# Altium PCB urbanturbine_rev2.PcbDoc
Units mm, origin at the board's own origin, x right, y up, seen from the top; angles counter-clockwise.
Board outline 96.52 x 63.5 mm, 2 copper layers (Top Layer, Bottom Layer); 33 components, 40 nets, 148 pads, 15 vias.
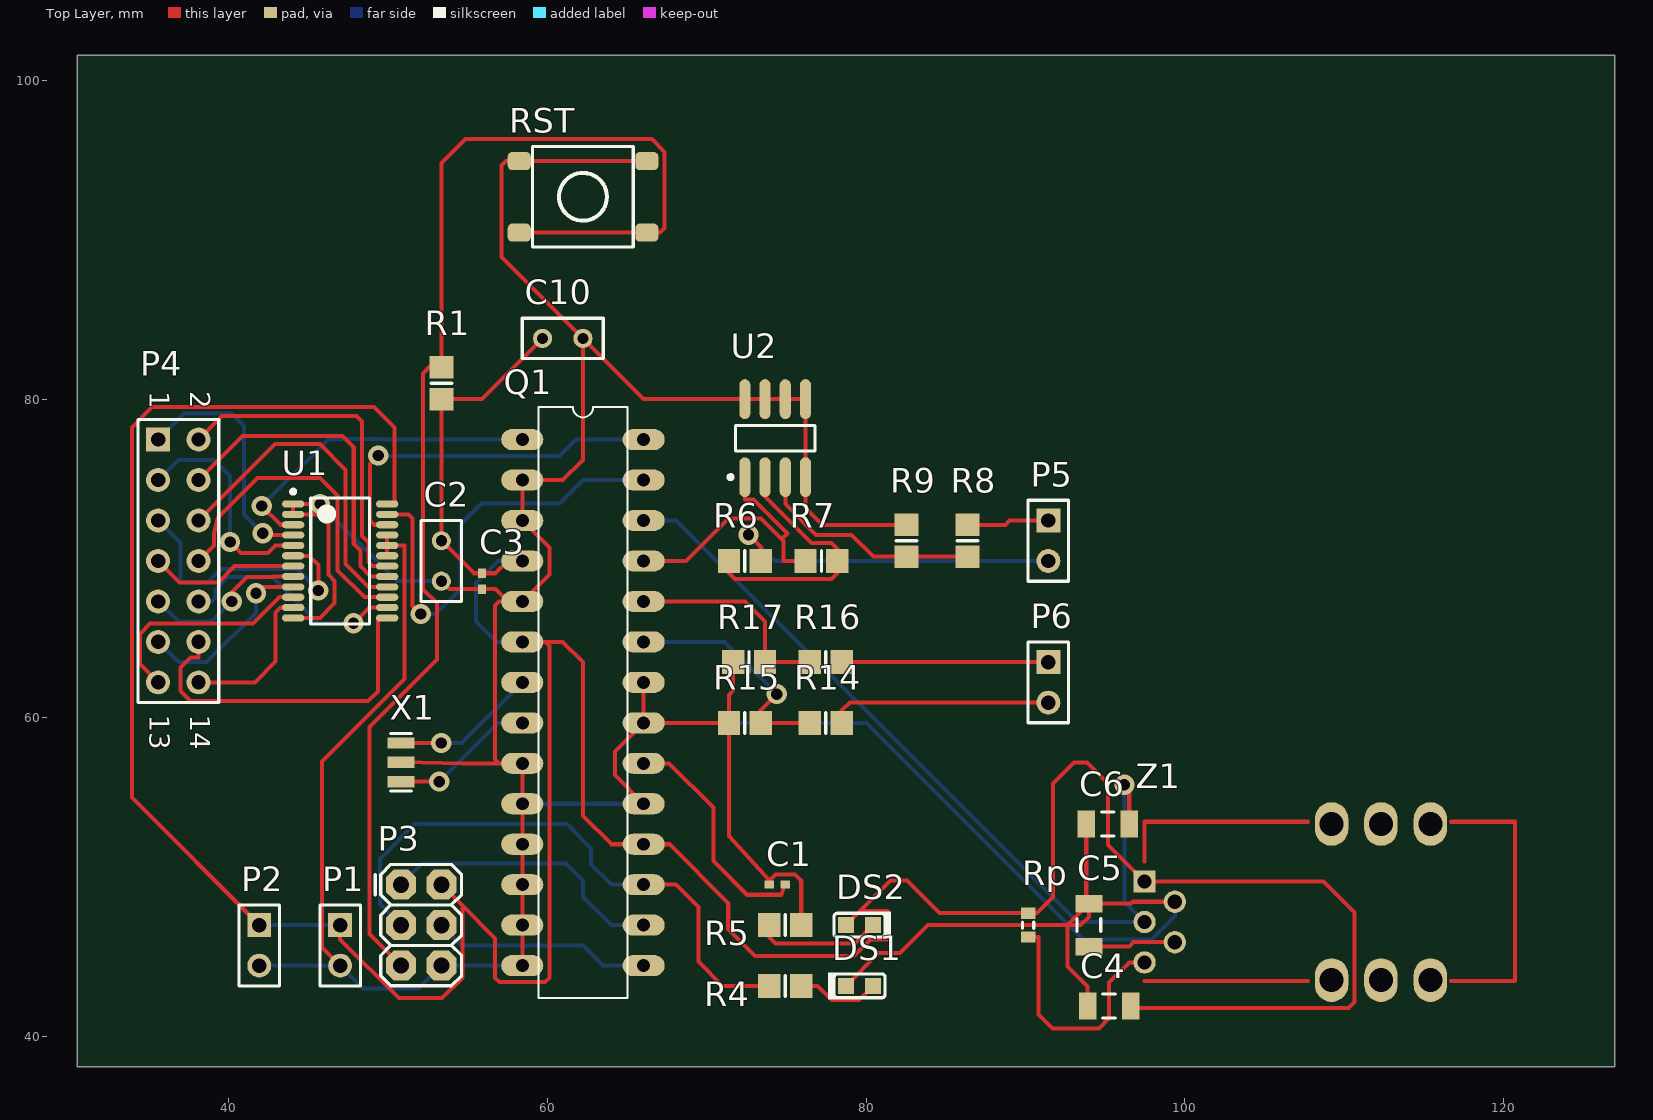
[diagram p0: Top Layer view]
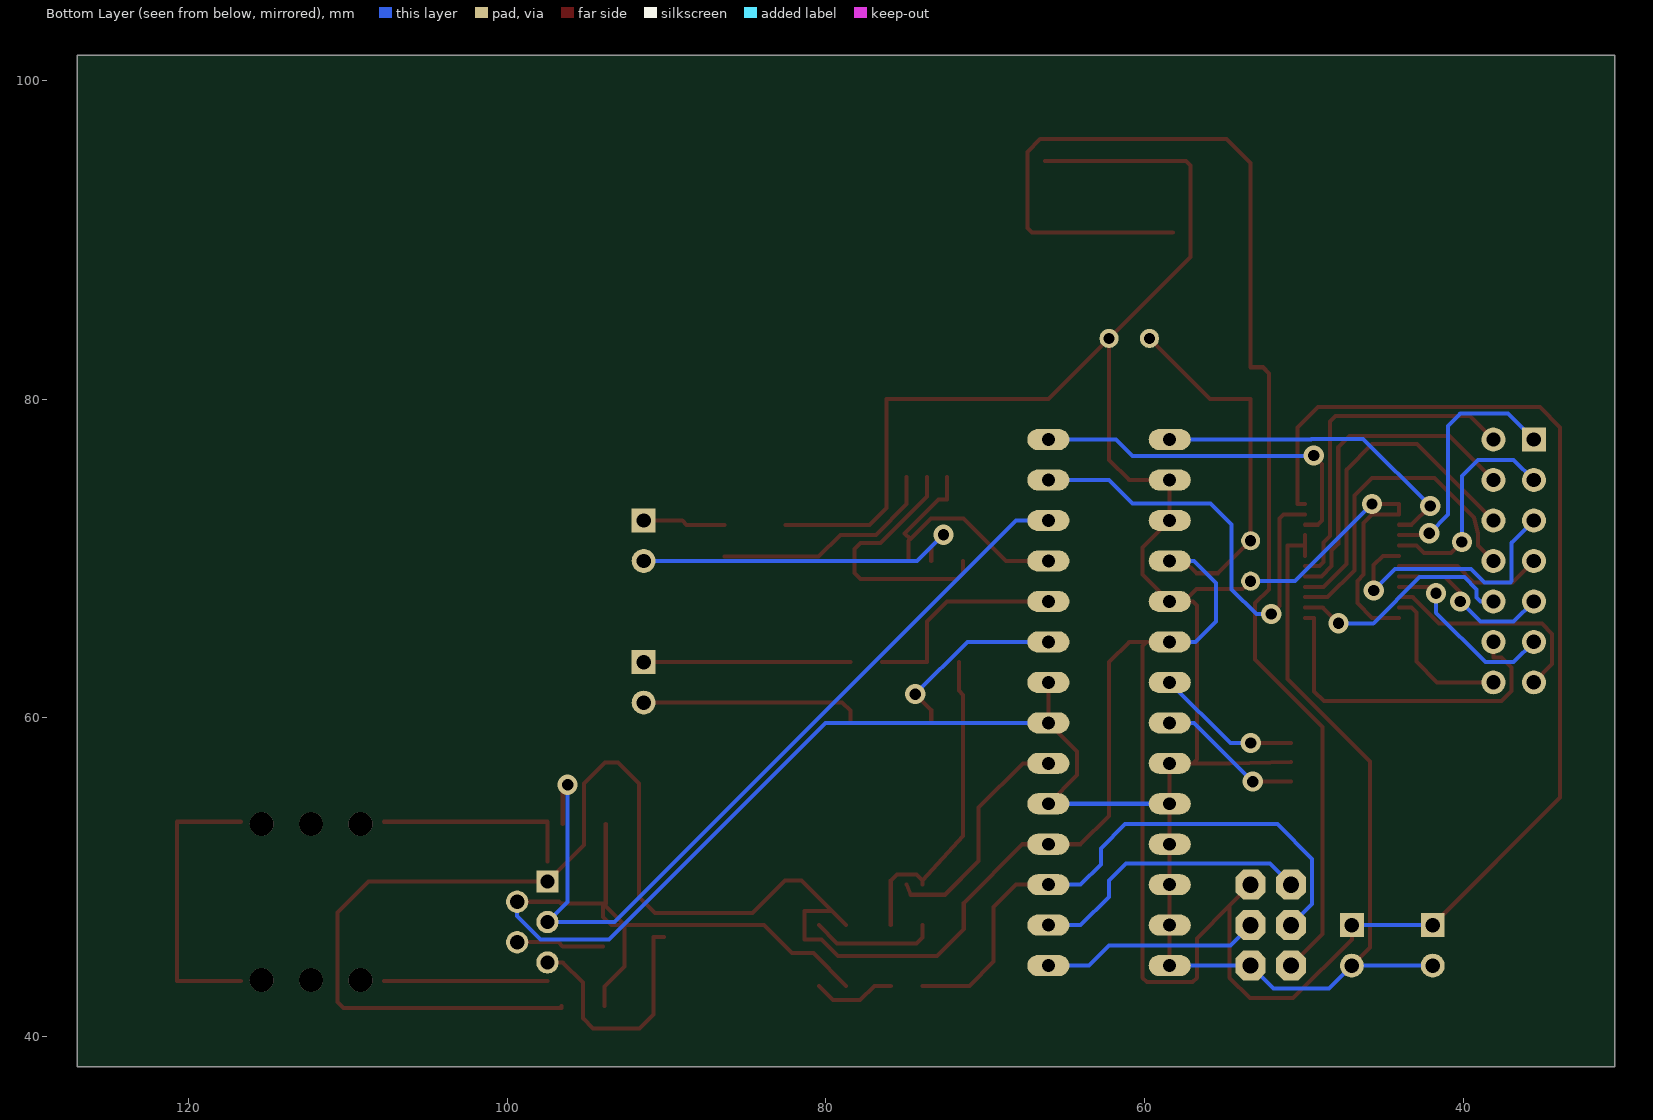
[diagram p1: Bottom Layer view, seen from below]

## Layer stack, top to bottom
Top Solder: solder mask 0.0102, Solder Resist, Dk 3.5
Top Layer: signal copper 0.0356
Dielectric 1: dielectric 0.32, FR-4, Dk 4.8
Bottom Layer: signal copper 0.0356
Bottom Solder: solder mask 0.0102, Solder Resist, Dk 3.5

## Board outline
30.48,38.1 30.48,101.6 127,101.6 127,38.1

## Design rules (kind name [scope] priority, off if disabled: settings)
Clearance [All] p1: gap=0.254 ignorepadtopadclearanceinfootprint=FALSE except(0: Arc-Hole Track-Hole SMDPad-Hole THPad-Hole Via-Hole Fill-Hole Poly-Hole Region-Hole Text-Hole)
PolygonConnect [All] p1: connectstyle=Relief reliefconductorwidth=0.254 reliefentries=4 polygonreliefangle="90 Angle" airgapwidth=0.254
RoutingVias [All] p1: holewidth=0.711 width=1.27 viastyle="Through Hole" minholewidth=0.711 minwidth=1.27 maxholewidth=0.711 maxwidth=1.27
SolderMaskExpansion [All] p1: expansion=0.102
Width [All] p1: maxlimit=0.254 minlimit=0.254 preferedwidth=0.254
30 further rules are at their usual default settings.

## Classes and differential pairs
component class urbanturbine: C1 C2 C3 C10 DS1 DS2 P1 P2 P3 P4 Q1 R1 R4 R5 RST U1 X1
component class sensors: C4 C5 C6 P5 P6 R6 R7 R8 R9 R14 R15 R16 R17 Rp U2 Z1

## Components (designator, comment, footprint, x,y, rotation, side; value= is the part's Value field where it differs from the comment)
C1 "C1005X7R1H104K050BB" 0402 74.43,49.53 r0 top value=0.1uF
C2 "Cap Pol1" RAD-0.1 53.34,69.85 r270 top value=100pF
C3 "C1005X7R1H104K050BB" 0402 55.88,68.58 r90 top value=0.1uF
C4 "Cap Semi" C1206 95.25,41.91 r180 top value=47uF
C5 "Cap Semi" C1206 93.98,46.99 r270 top value=47uF
C6 "Cap Semi" C1206 95.17,53.34 r0 top value=4.7uF
C10 "Cap Pol1" RAD-0.1 60.96,83.82 r0 top value=100pF
DS1 "LTST-C191KRKT" KING-LED0603-25-RED_V 79.59,43.18 r0 top
DS2 "LTST-C191KGKT" KING-LED0603-25-GREEN_V 79.59,46.99 r180 top
P1 "" HDR1X2 46.99,46.99 r270 top
P2 "" HDR1X2 41.91,46.99 r270 top
P3 "M20-9980346" 2X3 50.8,49.53 r270 top
P4 "Header 7X2" HDR2X7 35.56,77.47 r270 top
P5 "" HDR1X2 91.44,72.39 r270 top
P6 "" HDR1X2 91.44,63.5 r270 top
Q1 "ATMEGA328P-MU" *DIL28 62.23,60.96 r0 top
R1 "Res1" 6-0805_M 53.34,81.01 r90 top value=1K
R4 "Res1" 6-0805_M 74.93,43.18 r0 top value=1K
R5 "RC0603JR-071KL" 6-0805_M 74.93,46.99 r0 top value=1k
R6 "10k" 6-0805_M 72.39,69.85 r0 top value="100k Ohm"
R7 "100k" 6-0805_M 77.2,69.85 r0 top value="100k Ohm"
R8 "10k" 6-0805_M 86.36,71.12 r90 top value="100k Ohm"
R9 "100k" 6-0805_M 82.55,71.12 r90 top value="100k Ohm"
R14 "90k" 6-0805_M 77.47,59.69 r0 top value="10k Ohm"
R15 "10k" 6-0805_M 72.39,59.69 r0 top value="22k Ohm"
R16 "90k" 6-0805_M 77.47,63.5 r0 top value="10k Ohm"
R17 "10k" 6-0805_M 72.66,63.5 r0 top value="22k Ohm"
Rp "Res3" J1-0603 90.17,46.99 r270 top value=10K (schematic designator R?)
RST "PTS645SH50SMTR92 LFS" "TACTILE SWITCH SMD" 62.23,92.71 r0 top
U1 "TCA9548A" TCA9548A 46.99,69.85 r0 top
U2 "NCS2333" SO8_M 74.295,77.56 r90 top
X1 "16MHz" RESONATOR-SMD 50.8,57.21 r270 top
Z1 "LEM HO-25P" HO-25 97.48,50.98 r0 top (schematic designator Z*)

## Footprints (in the part's own frame and the unit in brackets; to place one, negate y for a bottom-side part, rotate by r counter-clockwise, add the part's x,y. Pads: shape width x height; smd on the part's side, far side on the other; paste and mask are expansions set on the pad)
2X3 [mil] "2X3"
  oct 74x74 hole 40: 1(0,0) 2(0,100) 3(100,0) 4(100,100) 5(200,0) 6(200,100)
  silkscreen extent -50,-63 250,150, body extent -50,-49 250,149, height 335
6-0805_M [mm] "Chip Resistor, Body 2.0x1.2mm, IPC Low Density"
  rect 1.4x1.5 smd: 1(-1,0) 2(1,0)
  silkscreen extent 0,-0.65 0,0.65, body extent -1.07,-0.7 1.07,0.7, height 0.7
0402 [mm] "Chip Capacitor, Body 1.0x0.5mm, IPC High Density"
  rect 0.6x0.5 smd: 1(-0.5,0) 2(0.5,0)
  body extent -0.55,-0.3 0.55,0.3, height 1.3
*DIL28 [mil]
  oval 104x52 hole 32: 1(-150,650) 2(-150,550) 3(-150,450) 4(-150,350) 5(-150,250) 6(-150,150) 7(-150,50) 8(-150,-50) 9(-150,-150) 10(-150,-250) 11(-150,-350) 12(-150,-450) 13(-150,-550) 14(-150,-650) 15(150,-650) 16(150,-550) 17(150,-450) 18(150,-350) 19(150,-250) 20(150,-150) 21(150,-50) 22(150,50) 23(150,150) 24(150,250) 25(150,350) 26(150,450) 27(150,550) 28(150,650)
  silkscreen extent -110,-730 110,730
C1206 [mm] "Chip Capacitor, Body 3.2x1.6mm, IPC High Density"
  rect 1.1x1.7 smd: 1(-1.35,0) 2(1.35,0)
  silkscreen extent -0.4,-0.75 0.4,0.75, body extent -1.7,-0.9 1.7,0.9, height 1.3
HDR1X2 [mm] "Connector; Header; 2 Position"
  rect 1.5x1.5 hole 0.9: 1(0,0)
  round 1.5 hole 0.9: 2(2.54,0)
  silkscreen extent -1.27,-1.27 3.81,1.27
HDR2X7 [mm] "Connector; Header; 7x2 Position"
  rect 1.5x1.5 hole 0.9: 1(0,0)
  round 1.5 hole 0.9: 2(0,2.54) 3(2.54,0) 4(2.54,2.54) 5(5.08,0) 6(5.08,2.54) 7(7.62,0) 8(7.62,2.54) 9(10.16,0) 10(10.16,2.54) 11(12.7,0) 12(12.7,2.54) 13(15.24,0) 14(15.24,2.54)
  silkscreen extent -1.27,-1.27 16.51,3.81
HO-25 [mm]
  rect 1.4x1.4 / inner rect 2.5x1.4 / far side rect 1.4x1.4 hole 0.9: 1(0,-1.25)
  round 1.4 / inner oval 2.5x1.4 / far side round 1.4 hole 0.9: 2(1.905,-2.52) 3(0,-3.79) 4(1.905,-5.06) 5(0,-6.33)
  oval 2.1x2.74 / inner round 1.5 / far side round 1.5 hole 1.5: ""(11.74,-7.44) ""(11.74,2.36) ""(14.84,-7.44) ""(14.84,2.36) ""(17.94,-7.44) ""(17.94,2.36)
  Top Layer lines w0.254: 0,-7.5 10.25,-7.5 ; 0,0 0,2.5 10.25,2.5 ; 19.25,-7.5 23.25,-7.5 23.25,2.5 19.25,2.5
  body extent -0.22,-8.5 23.72,3.5, height 20.8
J1-0603 [mm] "Chip Resistor, Body 1.6x0.8mm, IPC High Density"
  rect 0.7x0.9 smd: 1(-0.75,0) 2(0.75,0)
  silkscreen extent -0.2,-0.35 0.2,0.35, body extent -0.85,-0.48 0.85,0.48, height 0.9
KING-LED0603-25-GREEN_V [mm] "LED, SMT, Body 1.6 x 0.8 mm, 0.25mm Thickness"
  rect 1x1 smd paste+0 mask+0: 1(0.85,0) 2(-0.85,0)
  silkscreen extent -1.97,-0.85 1.6,0.85, body extent -0.8,-0.4 0.8,0.4, height 0.25
KING-LED0603-25-RED_V [mm] "LED, SMT, Body 1.6 x 0.8 mm, 0.25mm Thickness"
  rect 1x1 smd paste+0 mask+0: 1(0.85,0) 2(-0.85,0)
  silkscreen extent -1.97,-0.85 1.6,0.85, body extent -0.8,-0.4 0.8,0.4, height 0.25
RAD-0.1 [mm] "Radial Cap, Thru-Hole; 2 Leads; 0.1 in Pin Spacing"
  round 1.2 hole 0.7: 1(-1.27,0) 2(1.27,0)
  silkscreen extent -2.54,-1.27 2.54,1.27
RESONATOR-SMD [mil] "RESONATOR-SMD"
  rect 28x67 smd: 1(-47.62,0) 2(-0.38,0) 3(47.62,0)
  silkscreen extent -71,-26 71,26
SO8_M [mm] "SOIC, 8-Leads, Body 4.9x3.9mm, Pitch 1.27mm, IPC Low Density"
  oval 2.5x0.7 smd: 1(-2.45,1.905) 2(-2.45,0.635) 3(-2.45,-0.635) 4(-2.45,-1.905) 5(2.45,-1.905) 6(2.45,-0.635) 7(2.45,0.635) 8(2.45,1.905)
  silkscreen extent -2.57,-2.5 0.8,2.93, body extent -2,-2.5 2,2.5, height 1.75
"TACTILE SWITCH SMD" [mil] "Switch, Through-Hole, 4 Leads, Body 8.5x8.5mm, Row Spacing 9.0mm, Pitch 4.5mm"
  rrect50% 57x45 smd: 1(157.87,-88.58) 2(-157.48,-88.58) 3(157.87,88.19) 4(-157.48,88.19)
  silkscreen extent -124,-124 124,124, body extent -177,-122 177,122, height 177
TCA9548A [mm] "TSOP, 24-Leads, Body 7.80x4.40mm, Pitch 0.65mm, IPC Medium Density"
  oval 1.4x0.45 smd: 1(-2.95,3.575) 2(-2.95,2.925) 3(-2.95,2.275) 4(-2.95,1.625) 5(-2.95,0.975) 6(-2.95,0.325) 7(-2.95,-0.325) 8(-2.95,-0.975) 9(-2.95,-1.625) 10(-2.95,-2.275) 11(-2.95,-2.925) 12(-2.95,-3.575) 13(2.95,-3.575) 14(2.95,-2.925) 15(2.95,-2.275) 16(2.95,-1.625) 17(2.95,-0.975) 18(2.95,-0.325) 19(2.95,0.325) 20(2.95,0.975) 21(2.95,1.625) 22(2.95,2.275) 23(2.95,2.925) 24(2.95,3.575)
  silkscreen extent -3.07,-3.95 1.85,4.47, body extent -3.27,-3.96 3.28,3.93, height 1.2

## Part data
C1 C3: "CAP CER 0.1UF 50V 10% X7R 0402", Capacitance=0.1µF, Manufacturer="TDK Corporation", Operating Temperature="-55°C ~ 125°C", Package / Case="0402 (1005 Metric)", Ratings=-, Supplier Part Number 1=445-5932-1-ND, Temperature Coefficient=X7R, Tolerance=±10%, Voltage - Rated=50V, Applications="General Purpose", Category=Capacitors, ComponentLink1Description=http://product.tdk.com/en/catalog/datasheets/mlcc_commercial_general_en.pdf, ComponentLink1URL=http://product.tdk.com/en/catalog/datasheets/mlcc_commercial_general_en.pdf, Features=-, Height - Seated (Max)=-, Lead Spacing=-, Lead Style=-, Manufacturer Part Number=C1005X7R1H104K050BB, Mounting Type="Surface Mount, MLCC", Packaging="Cut Tape (CT)", Pricing 1="1=0.21, 10=0.14, 100=0.0664, 250=0.05592, 500=0.04684, 1000=0.03845, 5000=0.03251 (CAD)", RoHS="RoHS Compliant", Size / Dimension="0.039\" L x 0.020\" W (1.00mm x 0.50mm)", Stock 1=7100869, Supplier 1=Digi-Key, Thickness (Max)="0.022\" (0.55mm)"
C2 C10: "Polarized Capacitor (Radial)", LatestRevisionDate=17-Jul-2002, LatestRevisionNote="Re-released for DXP Platform.", PackageDescription="Polarized Capacitor (Radial); 2 Leads", PackageReference=RB7.6-15, Published=8-Jun-2000, Publisher="Altium Limited"
C4 C5 C6: "Capacitor (Semiconductor SIM Model)", LatestRevisionDate=29-May-2009, LatestRevisionNote="IPC-7351 Footprint Added.", PackageDescription="Chip Capacitor", PackageReference=C1206, Published=8-Jun-2000, Publisher="Altium Limited"
DS1: "LED SUPER RED CLR THIN 0603 SMD", Color=Red, Current - Test=20mA, Lens Color=Colorless, Manufacturer="Lite-On Inc.", Millicandela Rating=54mcd, Package / Case="0603 (1608 Metric)", Supplier Part Number 1=160-1447-1-ND, Voltage - Forward (Vf) (Typ)=2V, Category=Optoelectronics, ComponentLink1Description=http://optoelectronics.liteon.com/upload/download/DS22-2000-223/S_110_LTST-C191KRKT.pdf, ComponentLink1URL=http://optoelectronics.liteon.com/upload/download/DS22-2000-223/S_110_LTST-C191KRKT.pdf, Height (Max)=0.55mm, Lens Style/Size="Rectangle with Flat Top, 1.10mm x 0.80mm", Lens Transparency=Clear, Manufacturer Part Number=LTST-C191KRKT, Mounting Type="Surface Mount", Packaging="Cut Tape (CT)", Pricing 1="1=0.42, 10=0.333, 100=0.1812, 250=0.1208, 500=0.10268, 1000=0.07853, 2500=0.07098 (CAD)", RoHS="RoHS Compliant", Size / Dimension="1.60mm L x 0.80mm W", Stock 1=239192, Supplier 1=Digi-Key, Viewing Angle=130°, Wavelength - Dominant=631nm, Wavelength - Peak=639nm
DS2: "LED GREEN CLEAR THIN 0603 SMD", Color=Green, Current - Test=20mA, Lens Color=Colorless, Manufacturer="Lite-On Inc.", Millicandela Rating=35mcd, Package / Case="0603 (1608 Metric)", Supplier Part Number 1=160-1446-6-ND, Voltage - Forward (Vf) (Typ)=2V, Category=Optoelectronics, ComponentLink1Description=http://optoelectronics.liteon.com/upload/download/DS22-2000-228/S_110_LTST-C191KGKT.pdf, ComponentLink1URL=http://optoelectronics.liteon.com/upload/download/DS22-2000-228/S_110_LTST-C191KGKT.pdf, Height (Max)=0.55mm, Lens Style/Size="Rectangle with Flat Top, 1.10mm x 0.80mm", Lens Transparency=Clear, Manufacturer Part Number=LTST-C191KGKT, Mounting Type="Surface Mount", Packaging=Digi-Reel®, Pricing 1="1=0.42, 10=0.333, 100=0.1812, 250=0.1208, 500=0.10268, 1000=0.07853, 2500=0.07098 (CAD)", RoHS="RoHS Compliant", Size / Dimension="1.60mm L x 0.80mm W", Stock 1=186242, Supplier 1=Digi-Key, Viewing Angle=130°, Wavelength - Dominant=571nm, Wavelength - Peak=574nm
P1 P2 P5 P6: library part "Header 2", "Header, 2-Pin", LatestRevisionDate=17-Jul-2002, LatestRevisionNote="Re-released for DXP Platform.", Publisher="Altium Limited"
P3: "DIL VERTICAL PC TAIL PIN HEADER", Color=Black, Manufacturer="Harwin Inc.", Supplier Part Number 1=952-2121-ND, Category="Connectors, Interconnects", ComponentLink1Description=http://cdn.harwin.com/pdfs/M20-998.pdf, ComponentLink1URL=http://cdn.harwin.com/pdfs/M20-998.pdf, Connector Type="Header, Unshrouded, Breakaway", Contact Finish=Tin, Contact Finish Thickness=-, Contact Mating Length="0.240\" (6.10mm)", Contact Type="Male Pin", Fastening Type=-, Features=-, Manufacturer Part Number=M20-9980346, Mounting Type="Through Hole", Number of Positions=6, Number of Positions Loaded=All, Number of Rows=2, Packaging=Bulk, Pitch="0.100\" (2.54mm)", Pricing 1="1=0.32, 10=0.299, 25=0.2552, 50=0.2232, 100=0.2072, 250=0.18336, 500=0.17534, 1000=0.14346, 2500=0.13151 (CAD)", RoHS="RoHS Compliant", Row Spacing="0.100\" (2.54mm)", Stock 1=14297, Supplier 1=Digi-Key, Termination=Solder
P4: "Header, 7-Pin, Dual row", LatestRevisionDate=17-Jul-2002, LatestRevisionNote="Re-released for DXP Platform.", Publisher="Altium Limited"
Q1: "IC MCU 8BIT 32KB FLASH 32QFN", Manufacturer=Atmel, Operating Temperature="-40°C ~ 85°C", Package / Case="32-VFQFN Exposed Pad", Supplier Device Package="32-VQFN (5x5)", Supplier Part Number 1=ATMEGA328P-MU-ND, Voltage - Supply (Vcc/Vdd)="1.8 V ~ 5.5 V", Category="Integrated Circuits (ICs)", ComponentLink1Description=http://www.atmel.com/images/atmel-8271-8-bit-avr-microcontroller-atmega48a-48pa-88a-88pa-168a-168pa-328-328p_datasheet_summary.pdf, ComponentLink1URL=http://www.atmel.com/images/atmel-8271-8-bit-avr-microcontroller-atmega48a-48pa-88a-88pa-168a-168pa-328-328p_datasheet_summary.pdf, Connectivity="I²C, SPI, UART/USART", Core Processor=AVR, Core Size=8-Bit, Data Converters="A/D 8x10b", EEPROM Size="1K x 8", Manufacturer Part Number=ATMEGA328P-MU, Number of I/O=23, Oscillator Type=Internal, Packaging=Tray, Peripherals="Brown-out Detect/Reset, POR, PWM, WDT", Pricing 1="1=5.01, 10=4.465, 100=3.6608, 250=3.30364, 500=2.96432, 1000=2.50003 (CAD)", Program Memory Size="32KB (16K x 16)", Program Memory Type=FLASH, RAM Size="2K x 8", RoHS="RoHS Compliant", Speed=20MHz, Stock 1=70195, Supplier 1=Digi-Key
R1 R4 Rp: "Resistor", Published=8-Jun-2000, Publisher="Altium Limited"
  R1 R4: LatestRevisionDate=17-Jul-2002, LatestRevisionNote="Re-released for DXP Platform.", PackageDescription="Axial Device, Thru-Hole; 2 Leads; 0.3 in Pin Spacing", PackageReference=AXIAL-0.3
  Rp: LatestRevisionDate=29-May-2009, LatestRevisionNote="IPC-7351 Footprint Added.", PackageDescription="Chip Resistor", PackageReference=J1-0603
R5: "RES SMD 1K OHM 5% 1/10W 0603", Manufacturer=Yageo, Operating Temperature="-55°C ~ 155°C", Package / Case="0603 (1608 Metric)", Power (Watts)="0.1W, 1/10W", Resistance (Ohms)=1k, Supplier Device Package=0603, Supplier Part Number 1=311-1.0KGRCT-ND, Temperature Coefficient=±100ppm/°C, Tolerance=±5%, Category=Resistors, ComponentLink1Description=http://www.yageo.com/NewPortal/yageodocoutput?fileName=/pdf/R-Chip/PYu-RC_Group_51_RoHS_L_3.pdf, ComponentLink1URL=http://www.yageo.com/NewPortal/yageodocoutput?fileName=/pdf/R-Chip/PYu-RC_Group_51_RoHS_L_3.pdf, Composition="Thick Film", Features="Moisture Resistant", Height="0.022\" (0.55mm)", Manufacturer Part Number=RC0603JR-071KL, Number of Terminations=2, Packaging="Cut Tape (CT)", Pricing 1="1=0.15, 10=0.016, 25=0.012, 100=0.0066, 250=0.005, 500=0.00402, 1000=0.00295, 2500=0.00256 (CAD)", RoHS="RoHS Compliant", Size / Dimension="0.063\" L x 0.031\" W (1.60mm x 0.80mm)", Stock 1=1746734, Supplier 1=Digi-Key
R6 R7 R8 R9: library part 100k-125mW-0805-1%, "Resistor, 100k, 125mW Power Rating, 0805 Package", ManufacturerReference=MCR10EZPF1003, PowerRating=125mWatt, Category=Resistor, DistributorName=Digikey, DistributorReference=RHM100KCRCT-ND, InventoryNumber=RES052, Other=1%, PackageReference=0805
R14 R16: library part 10k-125mW-0805-1%, "Resistor, 10k, 125mW Power Rating, 0805 Package", ManufacturerReference=MCR10EZPF1002, PowerRating=125mWatt, Category=Resistor, DistributorName=Digikey, DistributorReference=RHM10.0KCRCT-ND, InventoryNumber=RES038, Other=1%, PackageReference=0805
R15 R17: library part 22k-125mW-0805-1%, "Resistor, 22k, 125mW Power Rating, 0805 Package", ManufacturerReference=RMCF0805FT22K0, PowerRating=125mWatt, Category=Resistor, DistributorName=Digikey, DistributorReference=RMCF0805FT22K0CT-ND, InventoryNumber=RES044, Other=1%, PackageReference=0805
RST: "SWITCH TACTILE SPST-NO 0.05A 12V", Contact Rating @ Voltage="0.05A @ 12VDC", Illumination Type, Color=-, Manufacturer="C&K Components", Operating Force=200gf, Operating Temperature="-20°C ~ 60°C", Supplier Part Number 1=CKN9085CT-ND, Actuator Height off PCB, from Pins=5.00mm, Actuator Material="Polyamide (PA66), Nylon 6/6", Actuator Orientation="Top Actuated", Actuator Type=Standard, Category=Switches, Circuit=SPST-NO, ComponentLink1Description=http://www.ck-components.com/14409/pts645_25apr13.pdf/, ComponentLink1URL=http://www.ck-components.com/14409/pts645_25apr13.pdf/, Features=-, Illumination=Non-Illuminated, Illumination Voltage (Nominal)=-, Ingress Protection=-, Manufacturer Part Number="PTS645SH50SMTR92 LFS", Mechanical Life="100,000 Cycles", Mounting Type="Surface Mount", Outline="6.00mm x 6.00mm", Packaging="Cut Tape (CT)", Pricing 1="1=0.43, 10=0.418, 25=0.404, 50=0.3892, 100=0.3675, 250=0.34592, 500=0.3315 (CAD)", RoHS="RoHS Compliant", Stock 1=49163, Supplier 1=Digi-Key, Switch Function=Off-Mom, Switch Travel=-, Termination Style="Gull Wing"
U1: "IIC multiplexor"
U2: "IC dual op-amp"
X1: library part CSTNE16M0VH3C000R0, "CER RESONATOR 16MHZ SMD", Capacitance=33pF, Frequency=10MHz, Frequency Stability=±0.2%, Frequency Tolerance=±0.5%, Manufacturer="Murata Electronics North America", Manufacturer Part Number=CSTCE10M0G55Z-R0, Operating Temperature="-40°C ~ 125°C", Package / Case="3-SMD, Non-Standard", Supplier Part Number 1=490-4715-1-ND, Category="Crystals and Oscillators", ComponentLink1Description=http://www.murata.com/~/media/webrenewal/support/library/catalog/products/timingdevice/ceralock/p16e.ashx, ComponentLink1URL=http://www.murata.com/~/media/webrenewal/support/library/catalog/products/timingdevice/ceralock/p16e.ashx, Features="Built in Capacitor", Height="0.031\" (0.80mm)", Impedance=-, Mounting Type="Surface Mount", Packaging="Cut Tape (CT)", Pricing 1="1=0.69, 10=0.573, 50=0.5166, 100=0.4596, 500=0.43548, 1000=0.36763 (CAD)", RoHS="RoHS Compliant", Size / Dimension="0.126\" L x 0.051\" W (3.20mm x 1.30mm)", Stock 1=14995, Supplier 1=Digi-Key, Type=Ceramic
Z1: "Hall Effect Current Sensor"

## Via types
v1: diameter 1.27, hole 0.711, Top Layer to Bottom Layer, 15 vias

## Nets (pads, with @x,y where several pads share a name; then routed paths per layer and width w, separated by ;. In a path a pad name is that pad's centre, name@x,y a point inside that pad or via, vN(x,y) a via of type N, cw(c..) or ccw(c..) an arc to the next point about the centre after c; other vN are vias at no path point)
+5: C2.1 C3.2 C4.1 C10.1 DS2.1 P1.1 P2.1 P3.2 Q1.4 Q1.6 Q1.18 R1.1 Rp.1 U1.24 Z1.1 | length 251.8
  Top Layer w0.254: P2.1 33.909,54.991 33.909,78.232 35.179,79.502 49.124,79.502 50.394,78.232 50.394,73.425 U1.24 ; P1.1 46.99,46.101 50.673,42.418 53.391,42.418 54.661,43.688 54.661,48.209 ; P3.2 54.661,48.209 ; Q1.6 59.868,64.77 ; Q1.4 57.514,69.85 56.744,69.08 C3.2 55.38,69.08 C2.1 R1.1 55.88,80.01 C10.1 ; DS2.1 79.629,47.879 ; C4.1 96.6,41.783 110.287,41.783 110.668,42.164 110.668,47.774 108.712,49.73 Z1.1 95.199,52.011 95.199,55.88 93.878,57.201 93.066,57.201 91.745,55.88 91.745,48.768 90.717,47.74 Rp.1 84.619,47.74 82.575,49.784 81.534,49.784 79.629,47.879 ; 54.661,48.209 56.718,46.152 56.718,43.688 56.998,43.409 59.842,43.409 60.122,43.688 60.122,64.516 59.868,64.77 ; 59.868,64.77 60.96,64.77 62.23,63.5 62.23,53.848 64.008,52.07 Q1.18 67.666,52.07 71.349,48.387 71.349,46.736 73.025,45.06 79.228,45.06 80.269,46.101 81.331,46.101 81.331,47.879 79.629,47.879
  Bottom Layer w0.254: P2.1 P1.1 ; Q1.6 56.794,64.77 55.524,66.04 55.524,68.478 56.896,69.85 Q1.4
BME_C: P4.6 U1.16 | length 21
  Top Layer w0.254: P4.6 42.901,77.191 45.72,77.191 47.335,75.576 47.335,69.658 48.768,68.225 U1.16
BME_D: P4.8 U1.15 | length 20.7
  Top Layer w0.254: P4.8 39.065,70.815 39.065,71.552 39.312,72.586 41.794,75.068 45.72,75.068 46.827,73.961 46.827,69.251 48.503,67.575 U1.15
CRANK_C: P4.10 U1.14 | length 14.4
  Top Layer w0.254: v1(47.828,65.938) 48.815,66.925 U1.14
  Bottom Layer w0.254: P4.10 38.913,67.31 39.167,67.564 39.167,68.072 39.929,68.834 42.748,68.834 45.644,65.938 v1(47.828,65.938)
CRANK_CURRENT: Q1.25 R7.1 U2.1 | length 18.6
  Top Layer w0.254: Q1.25 68.707,69.85 71.374,72.517 73.406,72.517 74.701,71.222 ; U2.1 72.39,73.711 72.923,73.711 75.057,71.577 74.701,71.222 ; R7.1 74.803,69.85 74.803,71.12 74.701,71.222
CRANK_D: P4.12 U1.13 | length 21.9
  Top Layer w0.254: P4.12 38.1,63.805 37.592,63.805 36.957,63.17 36.957,61.697 37.592,61.062 48.743,61.062 49.352,61.671 49.352,66.275 U1.13
CRANK_IN_+: P6.2 R14.2 | length 13.9
  Top Layer w0.254: R14.2 78.47,60.452 78.978,60.96 P6.2
CRANK_SHUNT_+: P5.1 R8.2 | length 5.2
  Top Layer w0.254: R8.2 88.748,72.12 89.018,72.39 P5.1
CRANK_SHUNT_-: P5.2 R6.2 | length 21.5
  Top Layer w0.254: v1(72.619,71.501) 73.39,70.73 R6.2
  Bottom Layer w0.254: v1(72.619,71.501) 74.27,69.85 P5.2
CRANK_VOLTAGE: Q1.23 R14.1 R15.2 | length 15
  Top Layer w0.254: v1(74.397,61.493) 73.39,60.487 R15.2 R14.1
  Bottom Layer w0.254: Q1.23 71.12,64.77 v1(74.397,61.493)
GND: C1.1 C2.2 C3.1 C4.2 C5.1 C6.1 C10.2 DS1.2 P1.2 P2.2 P3.6 Q1.2 Q1.3 Q1.5 Q1.9 Q1.10 Q1.11 Q1.12 Q1.13 Q1.14 Q1.19 Q1.21 Q1.22 R5.2 R9.2 R15.1 R17.1 RST.3 RST.4 U1.1 U1.2 U1.12 U1.19 U1.20 U1.21 U2.4 U2.5 U2.6 U2.7 U2.8 X1.2 Z1.2 | length 299.6
  Top Layer w0.254: U1.12 45.72,66.275 46.645,67.2 46.645,68.597 46.253,68.988 46.253,72.242 45.72,72.775 U1.2 U1.1 v1(45.72,73.425) ; P1.2 45.847,45.593 45.847,57.252 51.029,62.433 51.029,70.825 U1.20 ; U1.19 U1.20 ; U1.21 U1.20 ; X1.2 54.68,57.15 56.972,57.15 ; C2.2 53.84,68.08 C3.1 56.744,68.08 Q1.5@57.514,67.31 ; Q1.14 Q1.13 Q1.12 Q1.11 Q1.10 Q1.9 56.972,57.15 ; Q1.19 64.237,56.413 64.237,57.887 Q1.21 ; Q1.22 Q1.21 ; RST.3 RST.4 57.404,94.95 57.125,94.671 57.125,88.925 C10.2 ; R17.1 71.66,61.713 71.39,61.443 R15.1 ; C1.1 73.93,49.784 ; R5.2 75.93,49.784 75.549,50.165 74.311,50.165 73.93,49.784 ; DS1.2 80.789,45.229 82.137,45.229 83.897,46.99 92.634,46.99 ; R9.2 77.262,72.12 76.2,73.182 U2.4 U2.5 U2.6 U2.7 U2.8 66.04,80.01 C10.2 ; C6.1 93.82,48.34 C5.1 ; C4.2 93.9,43.133 92.634,44.399 92.634,46.99 ; Z1.2 96.742,48.46 96.622,48.34 C5.1 ; 56.972,57.15 56.718,57.404 56.718,67.056 56.972,67.31 Q1.5@57.514,67.31 ; Q1.5@57.514,67.31 Q1.5 60.122,69.012 60.122,70.688 Q1.3 Q1.2 60.96,74.93 62.23,76.2 C10.2 ; Q1.21 R15.1 ; R15.1 71.39,52.578 73.93,49.784 ; 92.634,46.99 93.472,46.99 93.98,47.498 C5.1 ; 92.634,46.99 92.634,46.994 C5.1
  Bottom Layer w0.254: P2.2 P1.2 48.412,43.028 51.918,43.028 P3.6 Q1.14 ; v1(45.72,73.425) 50.565,68.58 C2.2 ; Q1.10 Q1.19 ; Q1.21 80.035,59.69 93.624,46.101 97.92,46.101 99.385,47.566 Z1.2
HUMIDITY_C: P4.7 U1.7 | length 9.5
  Top Layer w0.254: P4.7 36.906,68.504 39.345,68.504 40.366,69.525 U1.7
HUMIDITY_D: P4.5 U1.6 | length 17.4
  Top Layer w0.254: U1.6 45.039,70.175 45.618,69.596 v1(45.618,67.996)
  Bottom Layer w0.254: P4.5 36.957,70.993 36.957,68.58 37.033,68.504 38.659,68.504 39.497,69.342 44.272,69.342 v1(45.618,67.996)
MISO: P3.1 Q1.16 | length 18
  Bottom Layer w0.254: P3.1 52.121,50.851 61.163,50.851 62.23,49.784 62.23,48.768 64.008,46.99 Q1.16
MOSI: P3.4 Q1.15 | length 13.8
  Bottom Layer w0.254: P3.4 54.61,45.72 62.23,45.72 63.5,44.45 Q1.15
MUX_RST: Q1.1 U1.3 | length 20.6
  Top Layer w0.254: v1(42.062,73.304) 43.242,72.125 U1.3
  Bottom Layer w0.254: v1(42.062,73.304) 46.275,77.517 49.508,77.517 49.555,77.47 Q1.1
NetC1_2: C1.2 Q1.20 | length 14.7
  Top Layer w0.254: Q1.20 67.64,57.15 70.409,54.381 70.409,51.029 72.538,48.899 74.676,48.899 C1.2
NetC5_2: C5.2 Z1.4 | length 5.5
  Top Layer w0.254: C5.2 96.52,45.64 96.8,45.92 Z1.4
NetDS1_1: DS1.1 R4.2 | length 5.2
  Top Layer w0.254: R4.2 76.962,43.18 77.851,42.291 79.551,42.291 DS1.1
NetDS2_2: DS2.2 R5.1 | length 7.9
  Top Layer w0.254: R5.1 73.93,46.228 74.311,45.847 79.297,45.847 DS2.2
NetQ1_7: Q1.7 X1.1 | length 9.2
  Top Layer w0.254: X1.1 v1(53.34,58.42)
  Bottom Layer w0.254: v1(53.34,58.42) 54.61,58.42 Q1.7
NetQ1_8: Q1.8 X1.3 | length 9.1
  Top Layer w0.254: X1.3 v1(53.213,56.001)
  Bottom Layer w0.254: v1(53.213,56.001) 56.902,59.69 Q1.8
NetR6_1: R6.1 R7.2 U2.2 | length 16.5
  Top Layer w0.254: R6.1 71.39,69.088 71.771,68.707 77.819,68.707 78.2,69.088 R7.2 78.2,70.612 77.831,70.981 76.568,70.981 73.66,73.889 U2.2
NetR8_1: R8.1 R9.1 U2.3 | length 14.5
  Top Layer w0.254: U2.3 74.93,73.419 76.86,71.489 79.098,71.489 80.467,70.12 R9.1 R8.1
NetR?_2: Rp.2 Z1.5 | length 15.6
  Top Layer w0.254: Rp.2 90.83,46.24 90.83,41.377 91.694,40.513 94.615,40.513 95.25,41.148 95.25,43.38 96.52,44.65 Z1.5
PROX_C: P4.2 U1.18 | length 21.3
  Top Layer w0.254: P4.2 39.573,78.943 48.026,78.943 48.351,78.618 48.351,71.423 48.763,71.011 48.763,69.784 49.022,69.525 U1.18
PROX_D: P4.4 U1.17 | length 20.8
  Top Layer w0.254: P4.4 40.869,77.699 47.132,77.699 47.843,76.987 47.843,70.915 48.255,70.503 48.255,69.525 48.905,68.875 U1.17
RST: P3.5 R1.2 RST.1 RST.2 | length 83.2
  Top Layer w0.254: P3.5 48.819,46.431 48.819,59.436 53.061,63.678 53.061,67.208 52.197,68.072 52.197,81.629 52.578,82.01 R1.2 53.34,94.818 54.864,96.342 66.548,96.342 67.361,95.529 67.361,90.765 67.056,90.46 RST.1 RST.2
SCK: P3.3 Q1.17 R4.1 | length 36.9
  Top Layer w0.254: Q1.17 68.072,49.53 69.469,48.133 69.469,44.704 70.993,43.18 R4.1
  Bottom Layer w0.254: P3.3 49.479,48.311 49.479,51.156 51.664,53.34 61.214,53.34 62.738,51.816 62.738,50.8 64.008,49.53 Q1.17
SCL: Q1.28 U1.22 | length 22.6
  Top Layer w0.254: v1(49.378,76.469) 48.859,75.95 48.859,72.39 49.124,72.125 U1.22
  Bottom Layer w0.254: v1(49.378,76.469) 49.418,76.429 60.757,76.429 61.798,77.47 Q1.28
SDA: Q1.27 U1.23 | length 27.8
  Top Layer w0.254: U1.23 51.283,72.775 51.537,72.521 51.537,67.031 v1(52.045,66.523)
  Bottom Layer w0.254: v1(52.045,66.523) 52.984,66.523 54.534,68.072 54.534,72.136 55.855,73.457 60.757,73.457 62.23,74.93 Q1.27
SPEED_C: P4.11 U1.9 | length 11.7
  Top Layer w0.254: v1(41.707,67.818) 42.114,68.225 U1.9
  Bottom Layer w0.254: P4.11 36.83,63.5 38.608,63.5 41.707,66.599 v1(41.707,67.818)
SPEED_D: P4.9 U1.8 | length 10.5
  Top Layer w0.254: v1(40.183,67.31) 40.183,67.869 41.148,68.834 42.774,68.834 42.815,68.875 U1.8
  Bottom Layer w0.254: P4.9 36.83,66.04 38.913,66.04 v1(40.183,67.31)
TEMP_C: P4.3 U1.5 | length 14
  Top Layer w0.254: v1(40.081,71.044) 40.767,70.358 42.459,70.358 42.926,70.825 U1.5
  Bottom Layer w0.254: P4.3 36.83,76.2 39.065,76.2 40.081,75.184 v1(40.081,71.044)
TEMP_D: P4.1 U1.4 | length 15.6
  Top Layer w0.254: v1(42.126,71.59) 42.241,71.475 U1.4
  Bottom Layer w0.254: P4.1 37.186,79.096 40.183,79.096 40.945,78.334 40.945,72.771 v1(42.126,71.59)
TURBINE_C: P4.14 U1.11 | length 9.7
  Top Layer w0.254: P4.14 41.631,62.23 42.937,63.537 42.937,66.628 43.234,66.925 U1.11
TURBINE_CURRENT: C6.2 Q1.26 Z1.3 | length 53.6
  Top Layer w0.254: v1(96.215,55.804) 96.52,55.499 C6.2
  Bottom Layer w0.254: Q1.26 68.072,72.39 93.272,47.19 Z1.3 96.215,48.455 v1(96.215,55.804)
TURBINE_D: P4.13 U1.10 | length 14.1
  Top Layer w0.254: P4.13 34.417,63.373 34.417,65.278 35.052,65.913 41.504,65.913 43.166,67.575 U1.10
TURBINE_IN_+: P6.1 R16.2 | length 13
  Top Layer w0.254: R16.2 P6.1
TURBINE_VOLTAGE: Q1.24 R16.1 R17.2 | length 13.5
  Top Layer w0.254: Q1.24 72.39,67.31 73.66,66.04 R17.2 R16.1
pads on no net: Z1.

## Silkscreen, mask and mechanical layers (free items; w line width, h text height)
Mechanical 1:
  the board outline again, w0.254

## Text inside footprints (layer, text, board x,y; h text height)
P4: Top Overlay "2" at 37.592,80.518 h1.27 r270; Top Overlay "1" at 35.052,80.518 h1.27 r270; Top Overlay "14" at 37.592,60.198 h1.27 r270; Top Overlay "13" at 35.052,60.198 h1.27 r270